# Altium PCB FC_PiHat_REV1.PcbDoc
Units mm, origin at the board's own origin, x right, y up, seen from the top; angles counter-clockwise.
Board outline 65 x 56 mm, 4 copper layers (Top Layer, 5V, GND, Bottom Layer), stack 1.582 mm thick; 52 components, 67 nets, 278 pads, 92 vias.
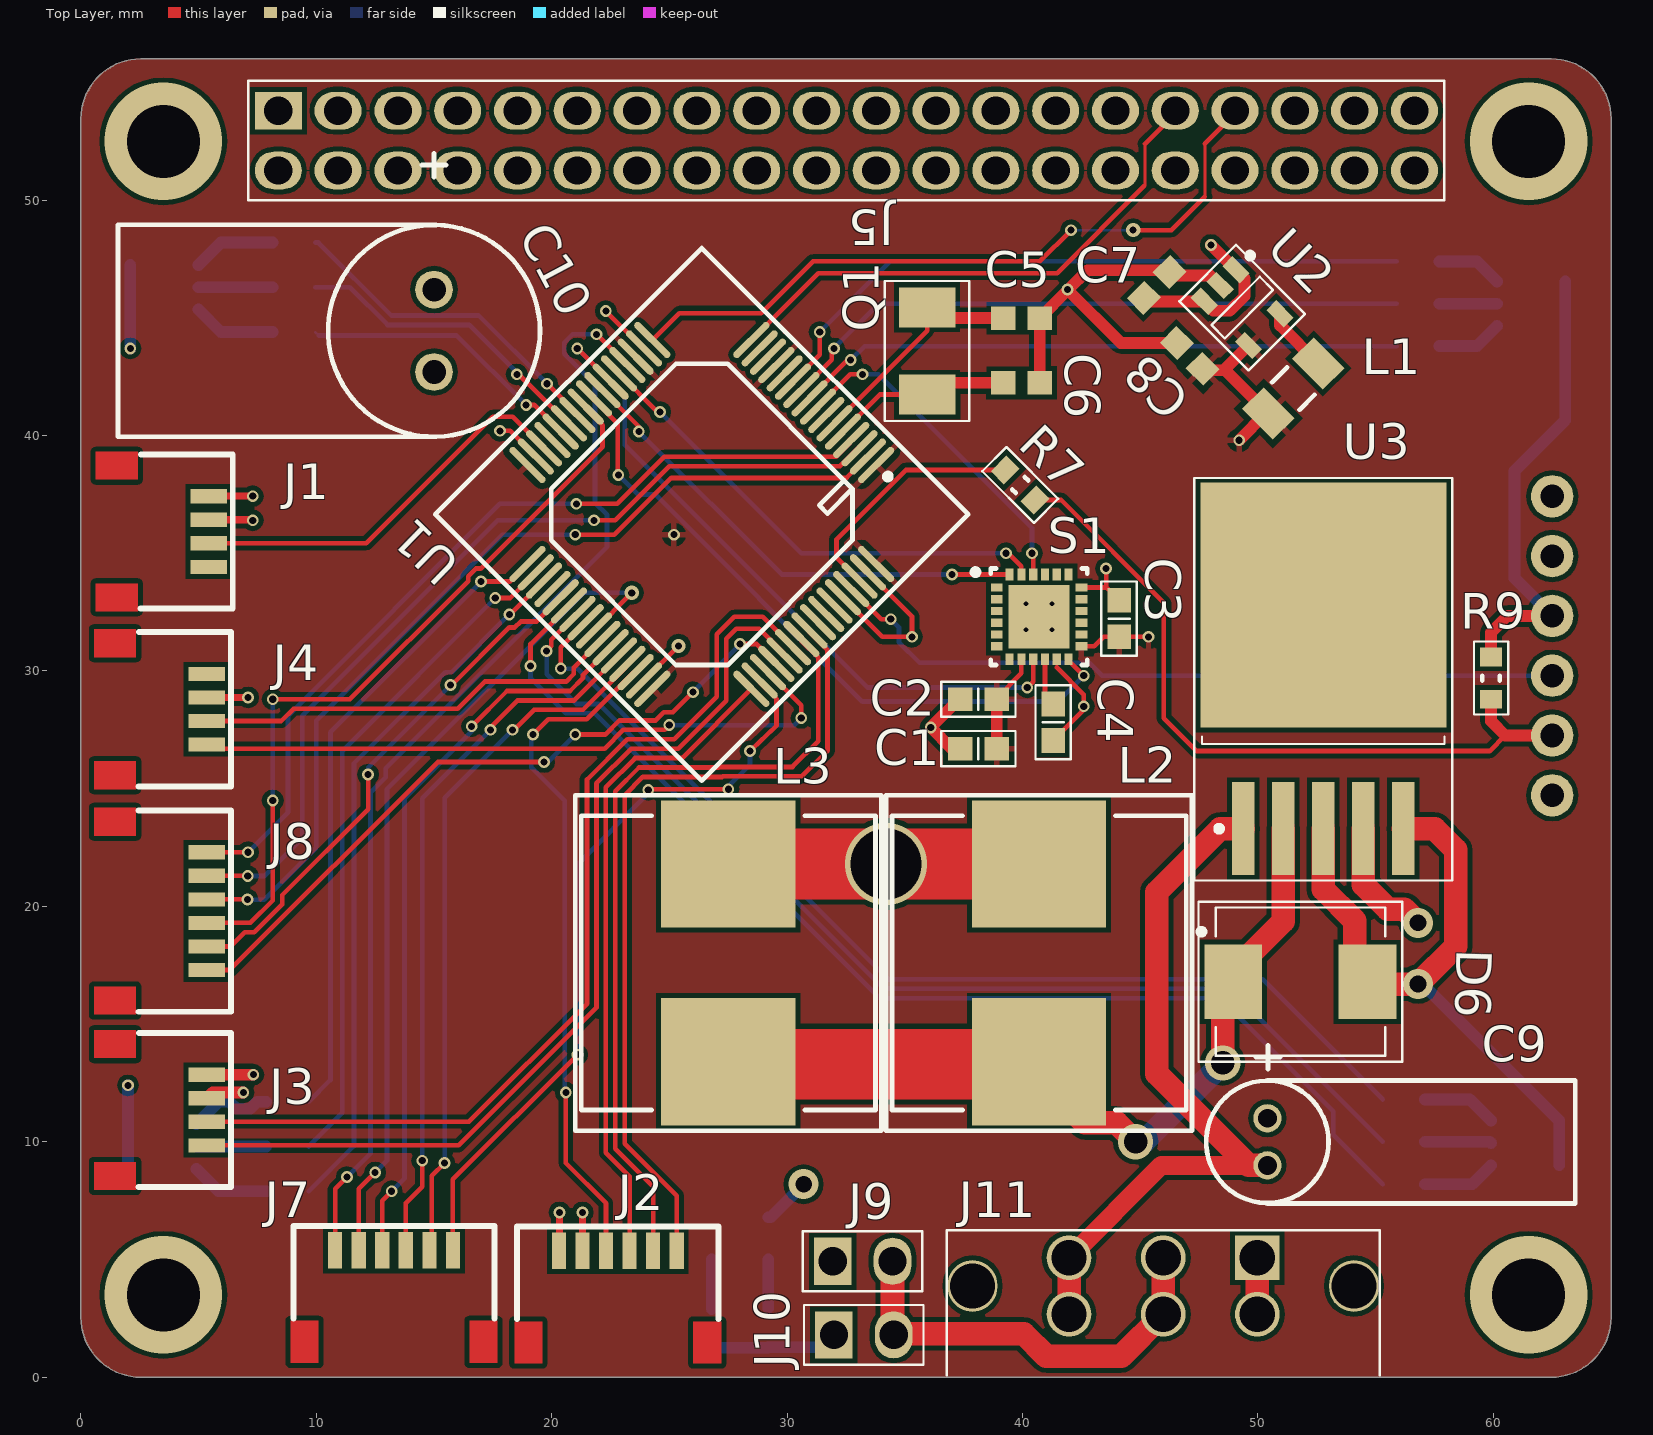
[diagram p0: Top Layer view]
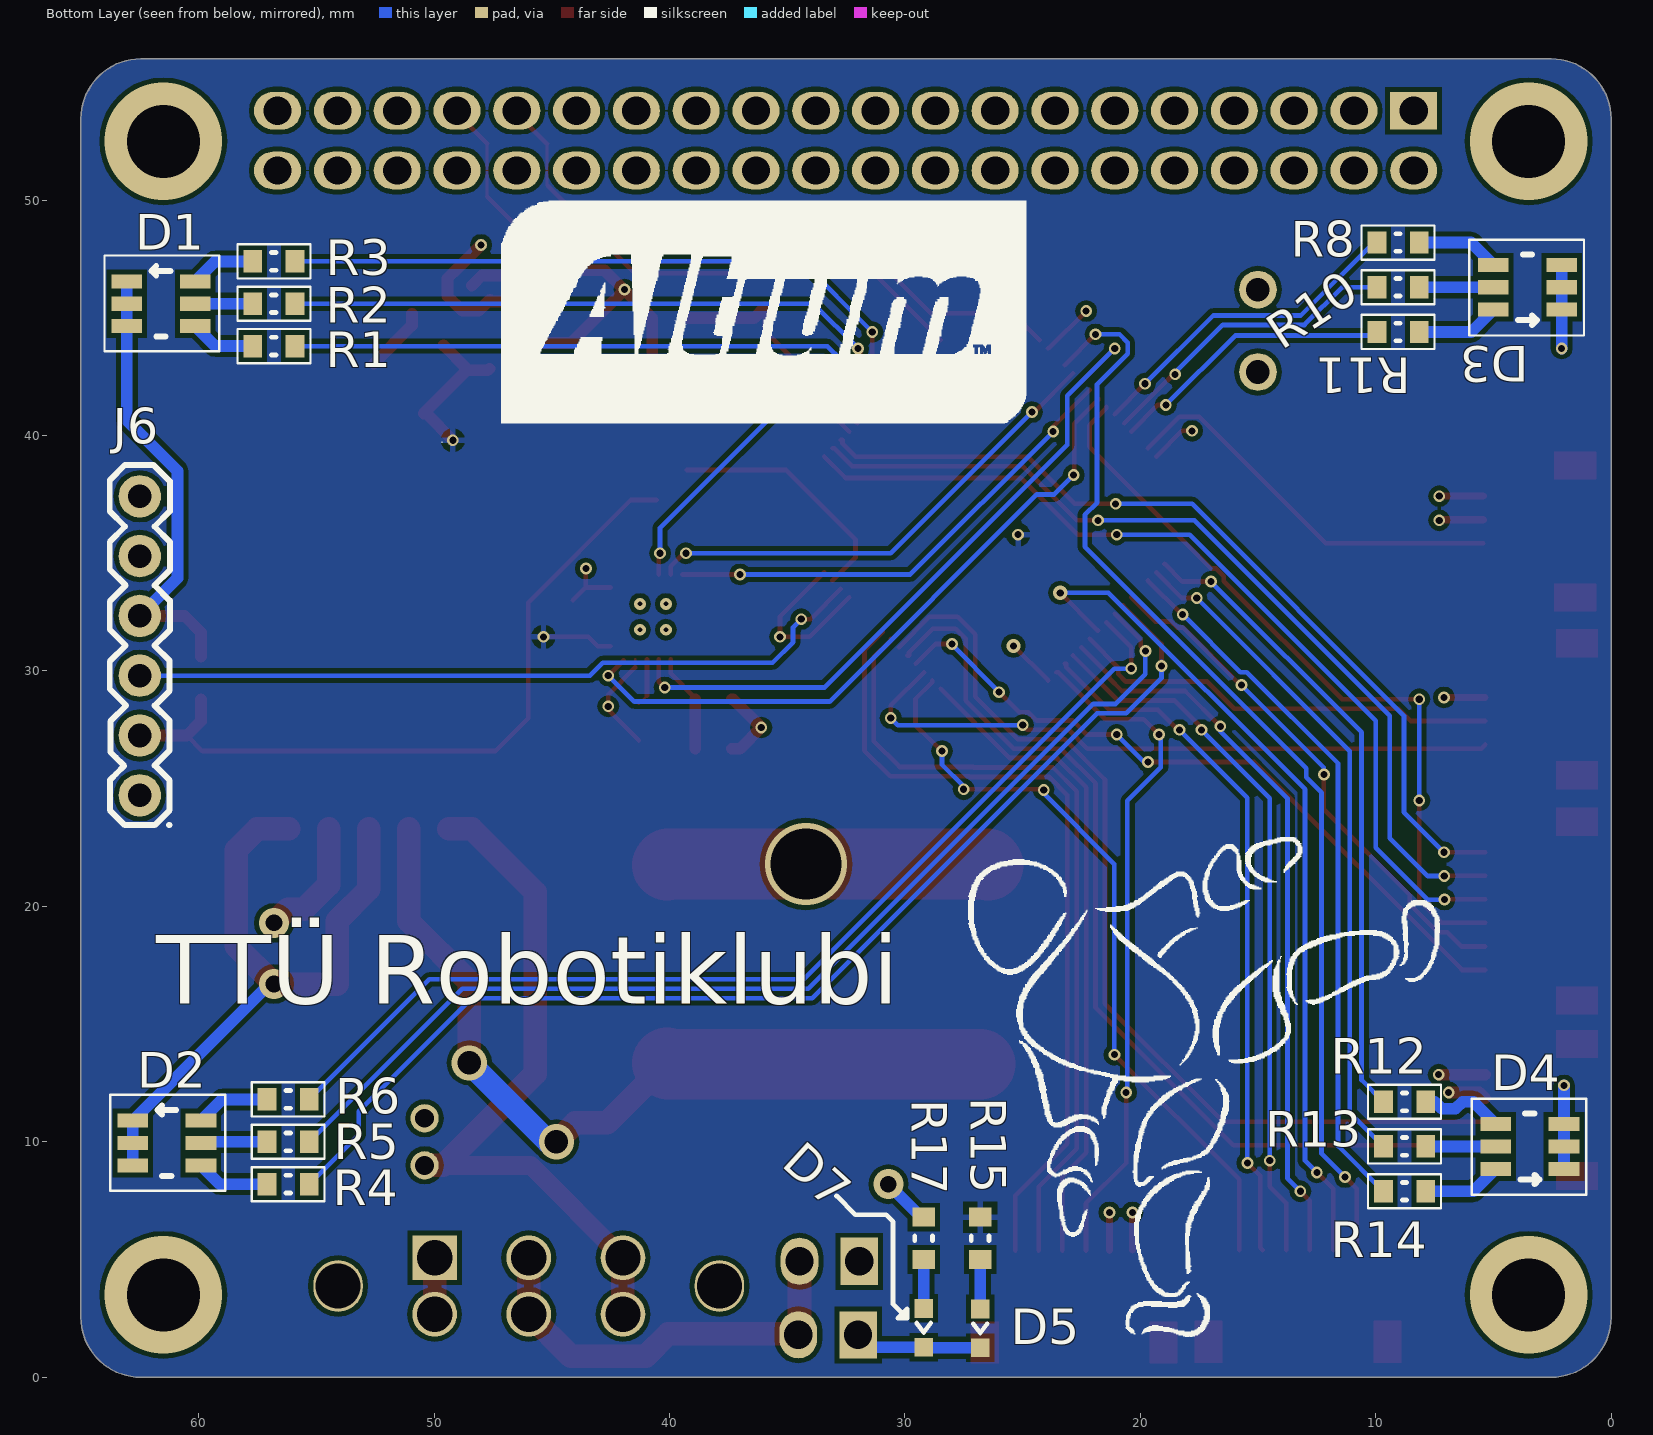
[diagram p1: Bottom Layer view, seen from below]
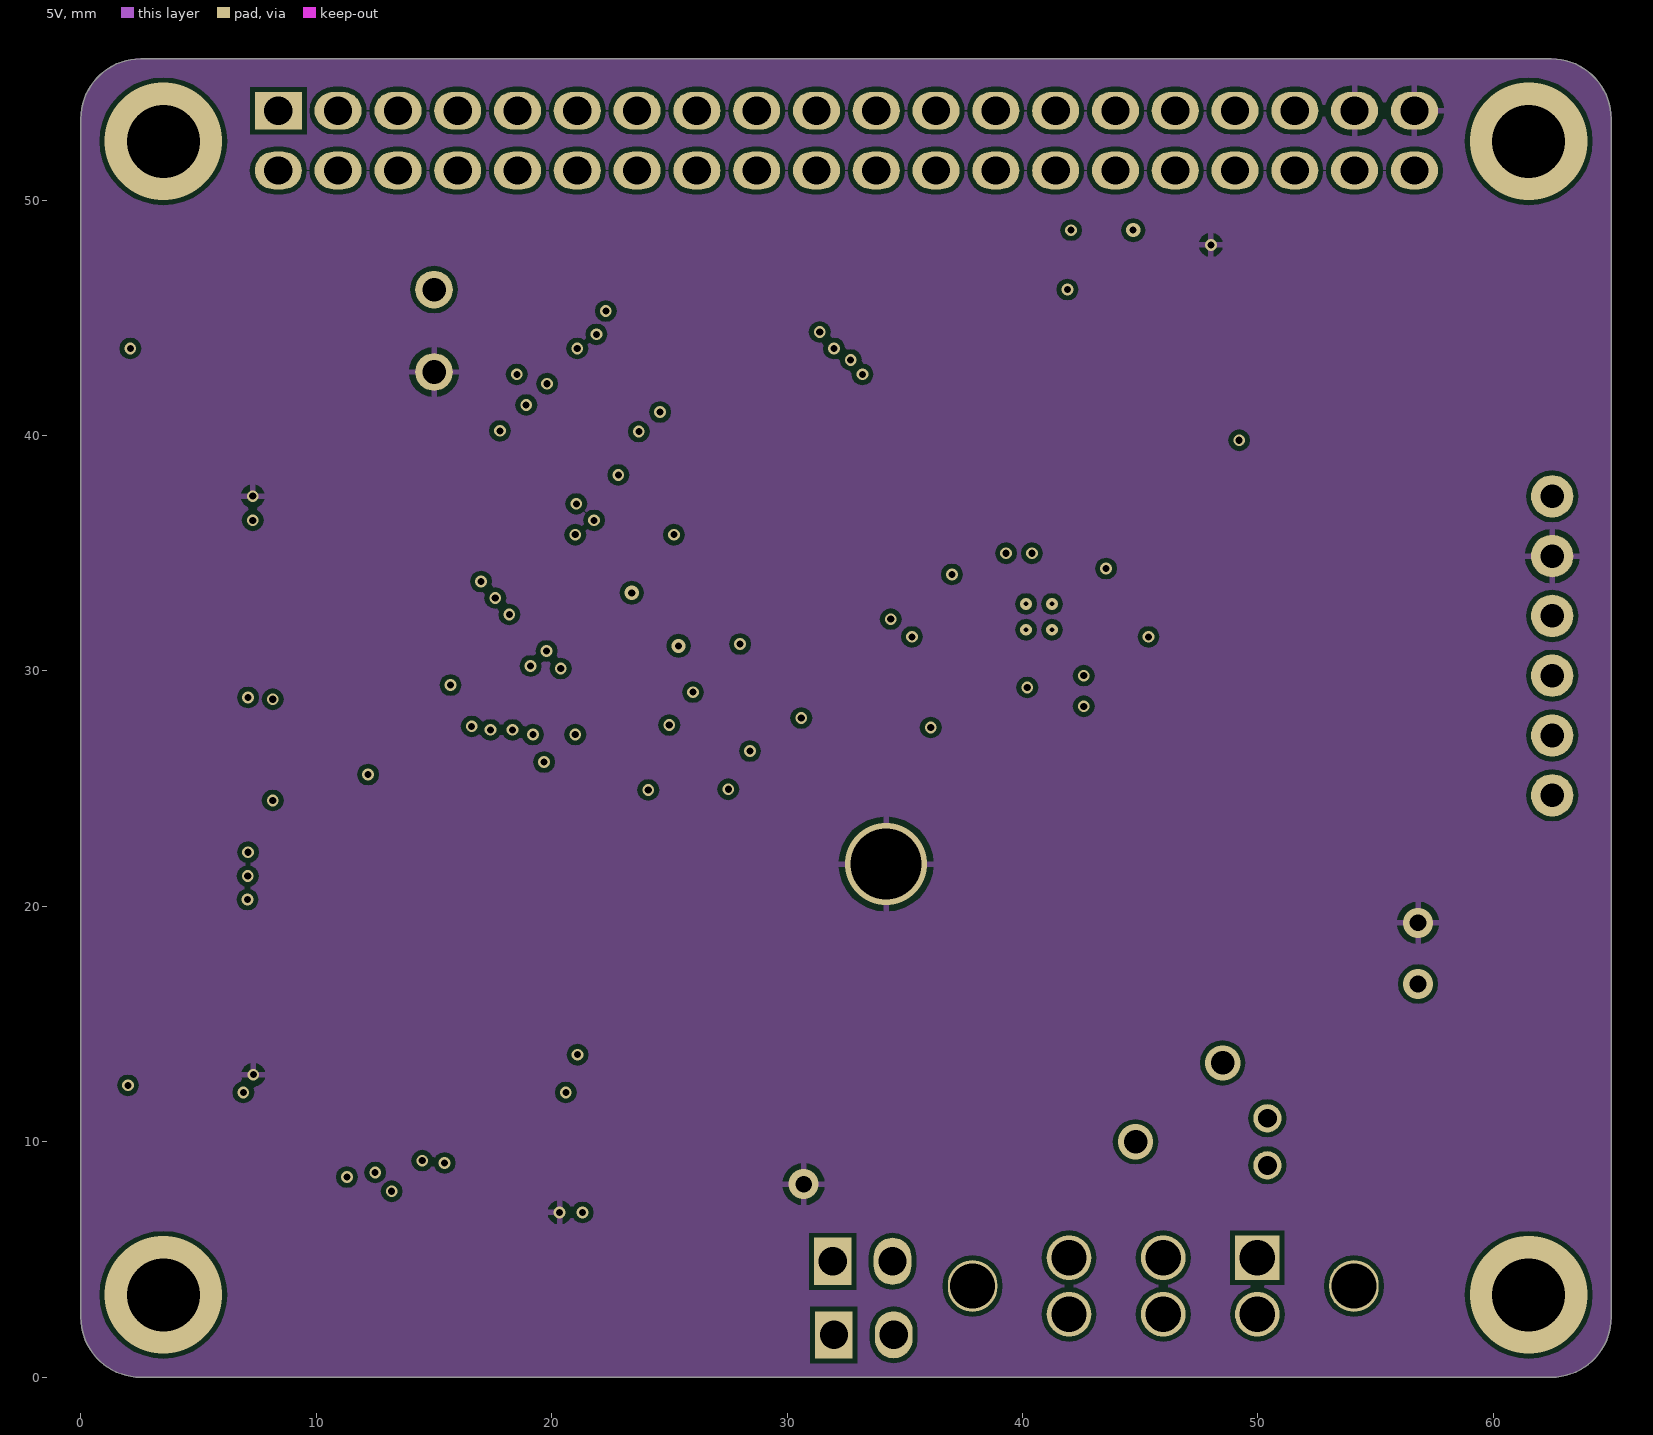
[diagram p2: 5V]
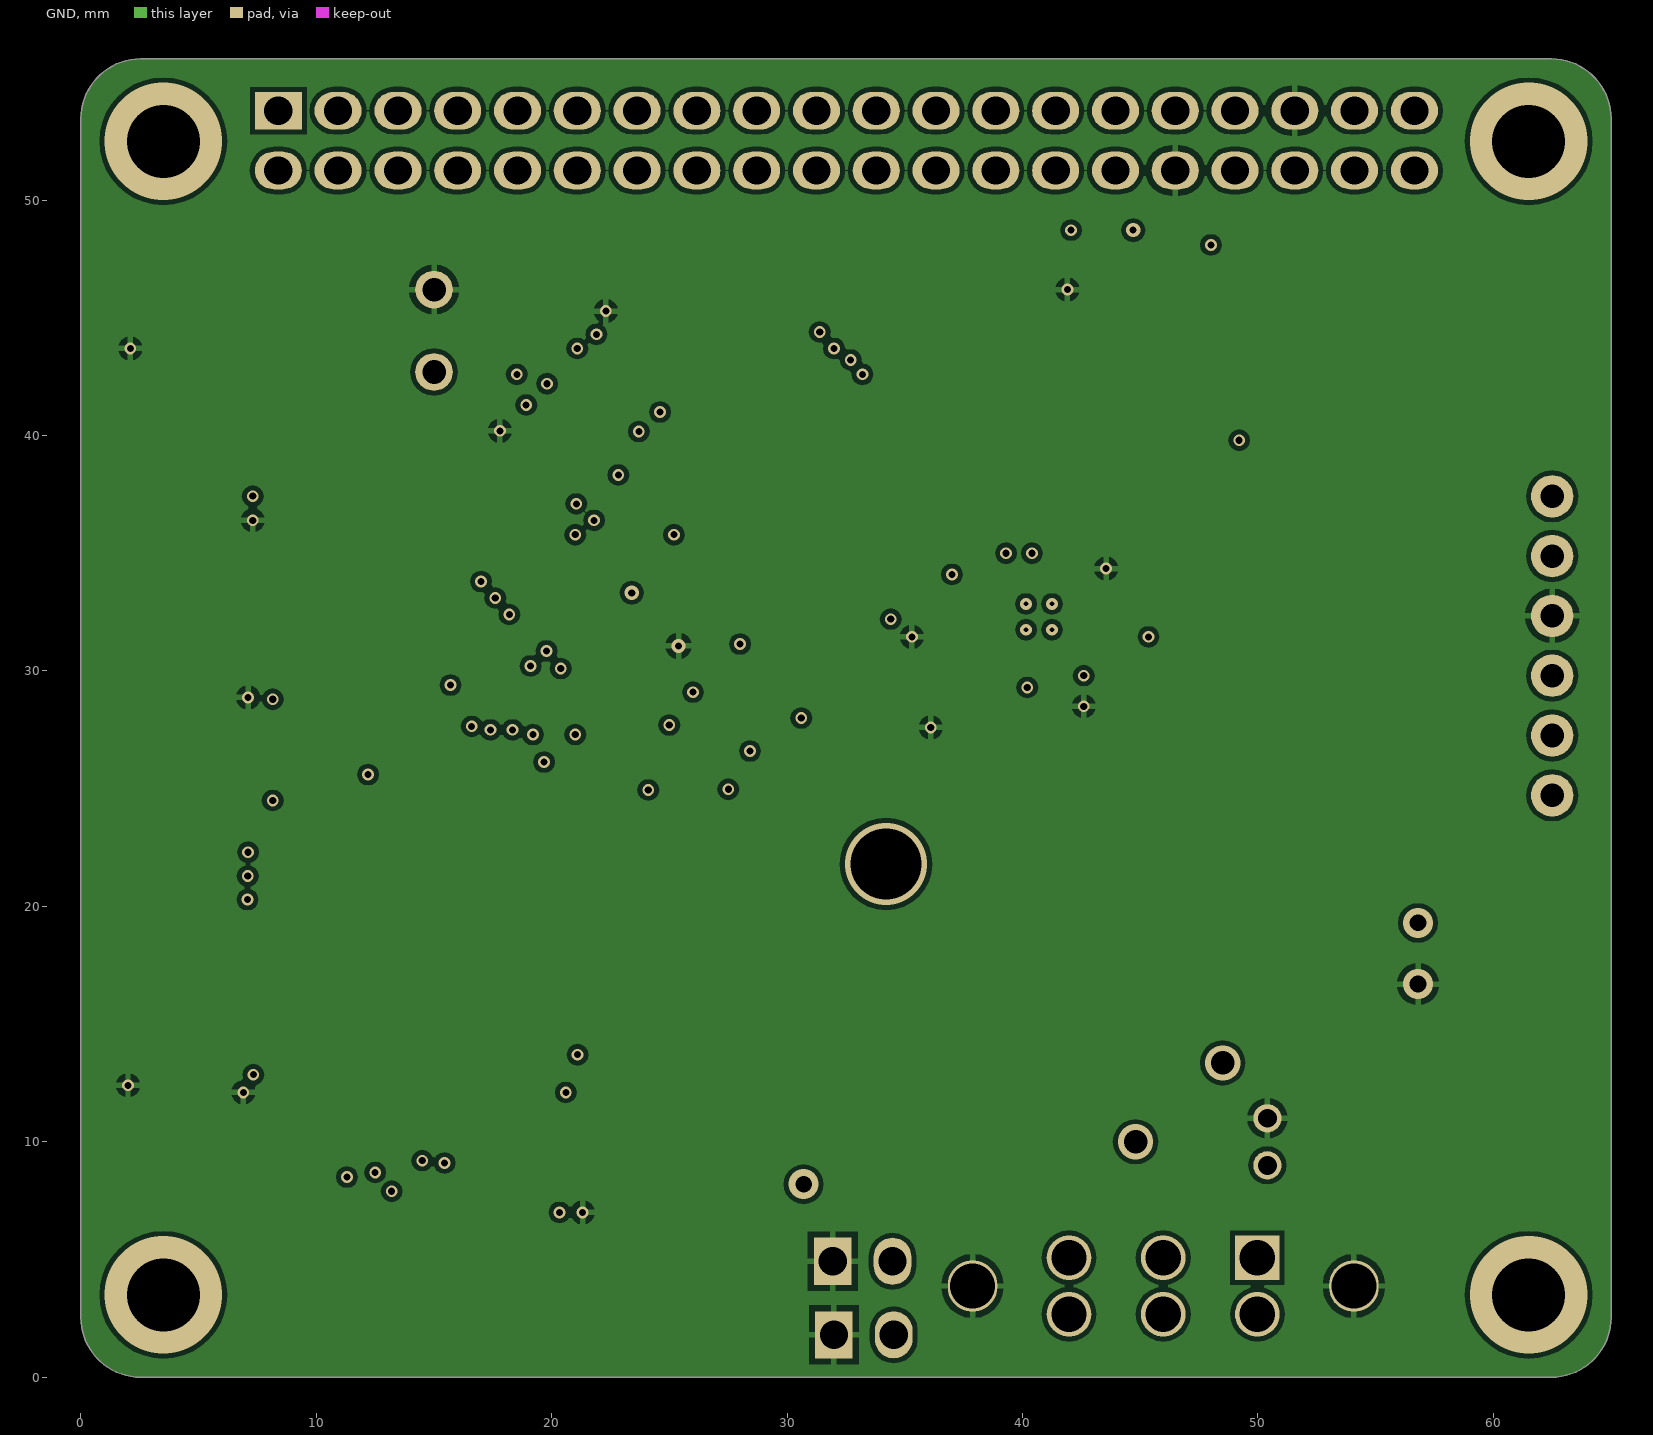
[diagram p3: GND]

## Layer stack, top to bottom
Top Solder: solder mask 0.0102, Solder Resist, Dk 3.5
Top Layer: signal copper 0.205
Dielectric 3: dielectric 0.254, FR-4, Dk 4.8
5V: signal copper 0.205
Dielectric 2: dielectric 0.254, FR-4, Dk 4.8
GND: signal copper 0.205
Dielectric 1: dielectric 0.254, FR-4, Dk 4.8
Bottom Layer: signal copper 0.205
Bottom Solder: solder mask 0.0102, Solder Resist, Dk 3.5

## Board outline
62.46,56 cw(c62.46,53.46) 65,53.46 65,2.54 cw(c62.46,2.54) 62.46,0 2.54,0 cw(c2.54,2.54) 0,2.54 0,53.46 cw(c2.54,53.46) 2.54,56

## Design rules (kind name [scope] priority, off if disabled: settings)
Clearance [All] p1: gap=0.2 ignorepadtopadclearanceinfootprint=TRUE
DiffPairsRouting [All] p1: maxlimit=0.254 minlimit=0.254 mostfreqgap=0.254 substack1={501780D6-565F-4292-AFB8-BEC87CBBFF92} toplayer_{501780d6-565f-4292-afb8-bec87cbbff92}_minwidth=0.381 toplayer_{501780d6-565f-4292-afb8-bec87cbbff92}_maxwidth=0.381 toplayer_{501780d6-565f-4292-afb8-bec87cbbff92}_prefwidth=0.381 midlayer1_{501780d6-565f-4292-afb8-bec87cbbff92}_minwidth=0.381 midlayer1_{501780d6-565f-4292-afb8-bec87cbbff92}_maxwidth=0.381 midlayer1_{501780d6-565f-4292-afb8-bec87cbbff92}_prefwidth=0.381 midlayer2_{501780d6-565f-4292-afb8-bec87cbbff92}_minwidth=0.381 midlayer2_{501780d6-565f-4292-afb8-bec87cbbff92}_maxwidth=0.381 midlayer2_{501780d6-565f-4292-afb8-bec87cbbff92}_prefwidth=0.381 bottomlayer_{501780d6-565f-4292-afb8-bec87cbbff92}_minwidth=0.381 bottomlayer_{501780d6-565f-4292-afb8-bec87cbbff92}_maxwidth=0.381 bottomlayer_{501780d6-565f-4292-afb8-bec87cbbff92}_prefwidth=0.381 toplayer_minwidth=0.381 toplayer_maxwidth=3 toplayer_prefwidth=0.381 midlayer1_minwidth=0.381 midlayer1_maxwidth=3 midlayer1_prefwidth=0.381 midlayer2_minwidth=0.381 midlayer2_maxwidth=3 midlayer2_prefwidth=0.381 bottomlayer_minwidth=0.381 bottomlayer_maxwidth=3 bottomlayer_prefwidth=0.381 maxuncoupledlength=12.7
HoleSize [All] p1: absolutevalues=TRUE maxlimit=3.5 minlimit=0.025 maxpercent=80.000 minpercent=20.000
PolygonConnect [All] p1: connectstyle=Relief reliefconductorwidth=0.254 reliefentries=4 polygonreliefangle="90 Angle" airgapwidth=0.254
RoutingVias [All] p1: holewidth=0.3 width=0.6 viastyle="Through Hole" minholewidth=0.3 minwidth=0.6 maxholewidth=1 maxwidth=3.5
SilkToSolderMaskClearance [IsPad] p1: minsilkscreentomaskgap=0.05 clearancetoexposedcopper=TRUE
SolderMaskExpansion [All] p1: expansion=0.1 istentingtop=FALSE
UnRoutedNet [All] p1: checkbadconnections=TRUE
Width [All] p1: maxlimit=3 minlimit=0.1 preferedwidth=0.5 substack1={501780D6-565F-4292-AFB8-BEC87CBBFF92}
26 further rules are at their usual default settings.

## Classes and differential pairs
component class "Power 5V": C9 C10 D6 D7 J9 J10 J11 L2 L3 R17 U3
component class "Power 3V3": C7 C8 D5 L1 R15 U2
component class Droon_REV3: C1 C2 C3 C4 C5 C6 D1 D2 D3 D4 J1 J2 J3 J4 J5 J6 J7 J8 Q1 R1 R2 R3 R4 R5 R6 R7 R8 R9 R10 R11 R12 R13 R14 S1 U1

## Components (designator, comment, footprint, x,y, rotation, side; value= is the part's Value field where it differs from the comment)
C1 "100nF" C0603 38.125,26.7 r0 top
C2 "100nF" C0603 38.125,28.8 r0 top
C3 "100nF" C0603 44.1,32.225 r270 top
C4 "100nF" C0603 41.3,27.825 r90 top
C5 "100nF" C0603 39.954,44.991 r180 top
C6 "100nF" C0603 39.954,42.242 r180 top
C7 "100nF" C0603 45.7,46.4 r225 top
C8 "100nF" C0603 47.1,43.386 r315 top
C9 "10uF" "Capacitor Through Hole 5x11" 50.4,9 r90 top
C10 "10uF" "Through hole Capacitor 16V 470uF" 15,42.7 r90 top
D1 "OVS-3309" "LED RGB" 61.6,45.6 r270 bottom
D2 "OVS-3309" "LED RGB" 61.35,9.95 r270 bottom
D3 "OVS-3309" "LED RGB" 3.55,46.3 r90 bottom
D4 "OVS-3309" "LED RGB" 3.45,9.8 r90 bottom
D5 "LED Single" "LED 0603" 26.8,2.075 r270 bottom
D6 "*" "Schottky Rectifier diode" 51.8,16.8 r0 top
D7 "LED Single" "LED 0603" 29.2,2.1 r270 bottom
J1 "Receiver" "JST-SH 4pin 1mm pitch" 0.625,39.325 r270 top
J2 "Header 6p" "JST-SH 6pin 1mm pitch" 18.409,0.575 r0 top
J3 "TFMini" "JST-SH 4pin 1mm pitch" 0.55,14.75 r270 top
J4 "FC" "JST-SH 4pin 1mm pitch" 0.55,31.775 r270 top
J5 "RPi_PWR+UART" "Header 2x20 2.54mm" 8.385,51.26 r0 top
J6 "Header 6p" "HEADER 6x1 2.54" 62.5,27.26 r0 bottom
J7 "Header 6p" "JST-SH 6pin 1mm pitch" 8.9,0.6 r0 top
J8 "Header 6p" "JST-SH 6pin 1mm pitch" 0.55,24.2 r270 top
J9 "2x1 Header" "Header 1x2 2.54mm" 31.935,4.925 r90 top
J10 "2x1 Header" "Header 1x2 2.54mm" 31.985,1.8 r90 top
J11 "Power Switch" "POWER SWITCH" 46,3.875 r270 top
L1 "Inductor" C1206 51.5,42 r225 top value=10uH
L2 "Inductor" "Inductor 12.5x12.5x6mm" 40.7,17.6 r90 top value=10uH
L3 "Inductor" "Inductor 12.5x12.5x6mm" 27.5,17.6 r90 top value=10uH
Q1 "16MHz" "Clock 2012\"(5032)" 35.954,45.442 r270 top
R1 "1k" "R 0603" 56.8,43.8 r0 bottom
R2 "1k" "R 0603" 56.8,45.6 r0 bottom
R3 "1k" "R 0603" 56.8,47.4 r0 bottom
R4 "1k" "R 0603" 56.2,8.2 r0 bottom
R5 "1k" "R 0603" 56.2,10 r0 bottom
R6 "1k" "R 0603" 56.2,11.8 r0 bottom
R7 "1k" "R 0603" 39.9,37.9 r315 top
R8 "1k" "R 0603" 9.05,48.2 r180 bottom
R9 "1k" "R 0603" 59.9,29.7 r270 top
R10 "1k" "R 0603" 9.05,46.3 r180 bottom
R11 "1k" "R 0603" 9.05,44.4 r180 bottom
R12 "1k" "R 0603" 8.774,11.7 r180 bottom
R13 "1k" "R 0603" 8.774,9.805 r180 bottom
R14 "1k" "R 0603" 8.774,7.9 r180 bottom
R15 "1k" "R 0603" 26.8,5.9 r90 bottom
R17 "1k" "R 0603" 29.2,5.9 r270 bottom
S1 "S?" IMU-ICM-20689 40.7,32.3 r0 top
U1 "STM32F303RDT6" LQFP64-STM32F303 26.375,36.65 r225 top
U2 "TSOT-5 3V3 REG" "SOT-5 3V3 REG" 49.331,45.4 r315 top
U3 "LM2576-5.0WU" "5V 3A REG" 52.775,29.6 r90 top

## Footprints (in the part's own frame and the unit in brackets; to place one, negate y for a bottom-side part, rotate by r counter-clockwise, add the part's x,y. Pads: shape width x height; smd on the part's side, far side on the other; paste and mask are expansions set on the pad)
"5V 3A REG" [mm]
  rect 3.95x0.95 smd: 1(-6.3,3.4) 2(-6.3,1.7) 3(-6.3,0) 4(-6.3,-1.7) 5(-6.3,-3.4)
  rect 10.4x10.45 smd: 6(3.2,0)
  silkscreen extent -8.5,-5.47 8.6,5.48, body extent -7.21,-5.15 8.03,5.15, height 4.47
C0603 [mm] "0603 capacitor package"
  rect 1.05x1 smd: 1(-0.775,0) 2(0.775,0)
  silkscreen extent -1.58,-0.75 1.58,0.75, body extent -0.9,-0.45 0.9,0.45, height 0.9
C1206 [mm] "1206 capacitor package"
  rect 1.3x1.85 smd: 1(-1.5,0) 2(1.5,0)
  silkscreen extent -0.45,-0.82 0.45,0.82, body extent -1.7,-0.9 1.7,0.9, height 1.5
"Capacitor Through Hole 5x11" [mm] "100uF"
  round 1.2 hole 0.8: 1(0,0) 2(2,0)
  silkscreen extent -1.63,-13.08 5.1,2.6, body extent -1.55,-13.01 3.5,0.31, height 5.03
"Clock 2012\"(5032)" [mm]
  rect 1.7x2.4 smd: 1(0,0) 2(3.7,0)
  silkscreen extent -1.13,-1.8 4.83,1.78, body extent -0.65,-1.63 4.35,1.57, height 1.36
"Header 1x2 2.54mm" [mm]
  rect 2x1.6 hole 1.2: 1(0,0)
  oval 2x1.6 hole 1.2: 2(0,-2.54)
  silkscreen extent -1.27,-3.81 1.27,1.27
"Header 2x20 2.54mm" [mm]
  oval 2x1.6 hole 1.2: 1(45.72,2.54) 1(48.26,2.54) 2(38.1,0) 2(43.18,2.54) 3(40.64,2.54) 4(38.1,2.54) 5(0,0) 5(2.54,0) 5(2.54,2.54) 5(5.08,0) 5(5.08,2.54) 5(7.62,0) 5(7.62,2.54) 5(10.16,0) 5(10.16,2.54) 5(12.7,0) 5(12.7,2.54) 5(15.24,0) 5(15.24,2.54) 5(17.78,0) 5(17.78,2.54) 5(20.32,0) 5(20.32,2.54) 5(22.86,0) 5(22.86,2.54) 5(25.4,0) 5(25.4,2.54) 5(27.94,0) 5(27.94,2.54) 5(30.48,0) 5(30.48,2.54) 5(33.02,0) 5(33.02,2.54) 5(35.56,0) 5(35.56,2.54) 5(40.64,0) 5(43.18,0) 5(45.72,0) 5(48.26,0)
  rect 2x1.6 hole 1.2: 5(0,2.54)
  silkscreen extent -1.27,-1.27 49.52,3.81, body extent -1.4,-1.2 49.7,3.8, height 8.5
"HEADER 6x1 2.54" [mm]
  round 1.8 hole 1: 1(0,2.54) 2(0,0) 3(0,-2.54) 4(0,-5.08) 5(0,-7.62) 6(0,-10.16)
  silkscreen extent -1.28,-11.5 1.28,3.81, body extent -9.8,-11.61 0.26,3.92, height 1.25
IMU-ICM-20689 [mm] "PQFN, 24-Leads, Body 4.00x4.00mm, Pitch 0.50mm, Thermal Pad 2.60x2.70mm, IPC Medium Density"
  rect 0.5x0.35 smd: 1(-1.8,1.25) 2(-1.8,0.75) 3(-1.8,0.25) 4(-1.8,-0.25) 5(-1.8,-0.75) 6(-1.8,-1.25) 13(1.8,-1.25) 14(1.8,-0.75) 15(1.8,-0.25) 16(1.8,0.25) 17(1.8,0.75) 18(1.8,1.25)
  rect 0.35x0.5 smd: 7(-1.25,-1.8) 8(-0.75,-1.8) 9(-0.25,-1.8) 10(0.25,-1.8) 11(0.75,-1.8) 12(1.25,-1.8) 19(1.25,1.8) 20(0.75,1.8) 21(0.25,1.8) 22(-0.25,1.8) 23(-0.75,1.8) 24(-1.25,1.8)
  rect 2.6x2.7 smd: 25(0,0)
  silkscreen extent -2.82,-2.05 2.05,2.05, body extent -2.05,-2.05 2.05,2.05, height 0.9
"Inductor 12.5x12.5x6mm" [mm] "Precision Wire Wound Inductor, 2-Leads, Body 12.50x12.50mm, IPC Medium Density"
  rect 5.4x5.7 smd: 1(-4.2,0) 2(4.2,0)
  silkscreen extent -7.12,-6.5 7.12,6.5, body extent -6.35,-6.25 6.35,6.25, height 6.1
"JST-SH 4pin 1mm pitch" [mm] "Right angle"
  rect 0.6x1.55 smd: 1(1.9,4.8) 2(2.9,4.8) 3(3.9,4.8) 4(4.9,4.8)
  Top Layer region: 5.6,0 6.8,0 6.8,1.8 5.6,1.8
  Top Layer region: 0,0 1.2,0 1.2,1.8 0,1.8
  silkscreen extent 0.13,1.9 6.68,5.82, body extent 0.4,0.11 6.4,5.06, height 2.96
"JST-SH 6pin 1mm pitch" [mm] "Right angle"
  rect 0.6x1.55 smd: 1(1.9,4.8) 2(2.9,4.8) 3(3.9,4.8) 4(4.9,4.8) 5(5.9,4.8) 6(6.9,4.8)
  Top Layer region: 7.6,0 8.8,0 8.8,1.8 7.6,1.8
  Top Layer region: 0,0 1.2,0 1.2,1.8 0,1.8
  silkscreen extent 0.13,1.9 8.67,5.82, body extent 0.4,0.11 8.4,5.06, height 2.96
"LED 0603" [mm]
  rect 0.8x0.8 smd: 1(-0.825,0) 2(0.825,0)
  silkscreen extent -0.2,-0.3 0.2,0.3, body extent -0.8,-0.4 0.8,0.4, height 0.75
"LED RGB" [mm]
  rect 0.6x1.3 smd: BA(-0.95,1.45) BK(-0.95,-1.45) GA(0,1.45) GK(0.95,-1.45) RA(0.95,1.45) RK(0,-1.45)
  silkscreen extent -2.05,-2.4 2.02,2.47, body extent -1.4,-1.7 1.4,1.7, height 1.45
LQFP64-STM32F303 [mm] "CQFP, 64-Leads, Body 14.70x14.70mm, Pitch 0.50mm, IPC Medium Density"
  oval 2.05x0.3 smd: 1(-6.725,3.75) 2(-6.725,3.25) 3(-6.725,2.75) 4(-6.725,2.25) 5(-6.725,1.75) 6(-6.725,1.25) 7(-6.725,0.75) 8(-6.725,0.25) 9(-6.725,-0.25) 10(-6.725,-0.75) 11(-6.725,-1.25) 12(-6.725,-1.75) 13(-6.725,-2.25) 14(-6.725,-2.75) 15(-6.725,-3.25) 16(-6.725,-3.75) 33(6.725,-3.75) 34(6.725,-3.25) 35(6.725,-2.75) 36(6.725,-2.25) 37(6.725,-1.75) 38(6.725,-1.25) 39(6.725,-0.75) 40(6.725,-0.25) 41(6.725,0.25) 42(6.725,0.75) 43(6.725,1.25) 44(6.725,1.75) 45(6.725,2.25) 46(6.725,2.75) 47(6.725,3.25) 48(6.725,3.75)
  oval 0.3x2.05 smd: 17(-3.75,-6.725) 18(-3.25,-6.725) 19(-2.75,-6.725) 20(-2.25,-6.725) 21(-1.75,-6.725) 22(-1.25,-6.725) 23(-0.75,-6.725) 24(-0.25,-6.725) 25(0.25,-6.725) 26(0.75,-6.725) 27(1.25,-6.725) 28(1.75,-6.725) 29(2.25,-6.725) 30(2.75,-6.725) 31(3.25,-6.725) 32(3.75,-6.725) 49(3.75,6.725) 50(3.25,6.725) 51(2.75,6.725) 52(2.25,6.725) 53(1.75,6.725) 54(1.25,6.725) 55(0.75,6.725) 56(0.25,6.725) 57(-0.25,6.725) 58(-0.75,6.725) 59(-1.25,6.725) 60(-1.75,6.725) 61(-2.25,6.725) 62(-2.75,6.725) 63(-3.25,6.725) 64(-3.75,6.725)
  silkscreen extent -8,-8 8,8, body extent -7.35,-7.35 7.35,7.35, height 1.5
"POWER SWITCH" [mm]
  rect 1.9x1.9 hole 1.5: 1(-1.2,3.975)
  round 1.9 hole 1.5: 1(1.2,3.975) 2(-1.2,-0.025) 2(1.2,-0.025) 3(-1.2,-4.025) 3(1.2,-4.025)
  oval 2.2x2.1 hole 1.9: 4(0,8.075) 4(0,-8.125)
  Top Layer lines w1: 1.2,-4.025 -1.2,-4.025 ; 1.2,-0.025 -1.2,-0.025 ; 1.2,3.975 -1.2,3.975
  silkscreen extent -2.37,-9.22 3.8,9.18
"R 0603" [mm] "Chip Resistor, 2-Leads, Body 1,6x0,8mm, IPC Medium Density"
  rect 0.8x0.95 smd: 1(-0.9,0) 2(0.9,0)
  silkscreen extent -1.55,-0.72 1.55,0.72, body extent -0.85,-0.45 0.85,0.45, height 0.55
"Schottky Rectifier diode" [mm] "SS34+ -  Schottky Rectifier, 40 V, 3 A, Single, DO-214AB, 2 Pins, 550 mV"
  rect 2.45x3.15 smd: 1(-2.85,0) 2(2.85,0)
  silkscreen extent -4.32,-3.4 4.33,3.4, body extent -3.77,-3.11 3.78,3.11, height 2.62
"SOT-5 3V3 REG" [mm]
  rect 1.05x0.6 smd: 1(-1.35,0.975) 2(-1.35,0.025) 3(-1.35,-0.925) 4(1.3,-0.925) 5(1.3,0.975)
  silkscreen extent -2.1,-1.68 2.05,1.95, body extent -1.42,-1.43 1.38,1.47, height 1
"Through hole Capacitor 16V 470uF" [mm]
  round 1.6 hole 1: 1(0,0) 2(3.5,0)
  silkscreen extent -2.75,-4.5 9.3,13.43, body extent -2.23,-0.32 5.83,13.5, height 8.03

## Part data
C1 C2 C3 C4 C5 C6 C7 C8: library part Capacitor, "Capacitor Ceramic"
C9 C10: library part "Capacitor Polarized", "Capacitor"
D1 D2 D3 D4: library part "LED Tripple", "LED RGB", FarnellPN=1716792, ManufacturerPN=OVS-3309
D5 D7: "LED"
D6: library part "Diode Schottky", "Diode Schottky"
J1 J3 J4: library part "Header 4p"
J9 J10: library part "2x1 Header (power)"
Q1: library part Crystal, "Quarz crystal"
R1 R2 R3 R4 R5 R6 R7 R8 R9 R10 R11 R12 R13 R14 R15 R17: library part Res, "Resistor"
S1: library part IMU_ICM-20689
U1: library part LQFP64-STM32F303, "ARM Cortex-M4 32-bit MCU, 384 KB Flash, 80 KB Internal RAM, 51 I/Os, 64-Pin LQFP, -40 to 85 degC, Tray"
U2: "ANALOG DEVICES         ADP2108AUJZ-3.3-R7            STEP-DOWN DC/DC CONVERTER, TSOT-5", Case/Package=TSOT, Manufacturer="Analog Devices", Manufacturer Part Number=ADP2108AUJZ-3.3-R7, Max Input Voltage=5.5V, Max Operating Temperature=125°C, Max Output Current=600mA, Min Input Voltage=2.3V, Min Operating Temperature=-40°C, Min Output Voltage=3.3V, Operating Supply Current=30uA, Quiescent Current=18uA, Supplier Part Number 1=2112606, Switching Frequency=3MHz, Accuracy=2%, ComponentLink1Description=http://uk.rs-online.com/webdocs/14ba/0900766b814bac03.pdf?src-supplier=RSComponents, ComponentLink1URL=http://uk.rs-online.com/webdocs/14ba/0900766b814bac03.pdf?src-supplier=RSComponents, ComponentLink2Description=http://www.farnell.com/datasheets/1838518.pdf?src-supplier=Element14, ComponentLink2URL=http://www.farnell.com/datasheets/1838518.pdf?src-supplier=Element14, ComponentLink3Description=http://www.analog.com/static/imported-files/data_sheets/ADP2108.pdf?src-supplier=Avnet, ComponentLink3URL=http://www.analog.com/static/imported-files/data_sheets/ADP2108.pdf?src-supplier=Avnet, ComponentLink4Description=http://www.farnell.com/datasheets/1537430.pdf?src-supplier=Farnell, ComponentLink4URL=http://www.farnell.com/datasheets/1537430.pdf?src-supplier=Farnell, ComponentLink5Description=https://www.analog.com/media/en/technical-documentation/data-sheets/ADP2108.pdf?src-supplier=Digi-Key, ComponentLink5URL=https://www.analog.com/media/en/technical-documentation/data-sheets/ADP2108.pdf?src-supplier=Digi-Key, ComponentLink6Description=http://www.analog.com/media/en/technical-documentation/data-sheets/ADP2108.pdf?src-supplier=Digi-Key, ComponentLink6URL=http://www.analog.com/media/en/technical-documentation/data-sheets/ADP2108.pdf?src-supplier=Digi-Key, Efficiency=95%, Height=0.9mm, Lead Free="Contains Lead", Length=2.9mm, Mount="Surface Mount", Nominal Output Voltage=3.3V, Number of Outputs=1, Number of Pins=5, Output Configuration=Positive, Output Current=600mA, Output Type=Fixed, Output Voltage=3.3V, Packaging="Tape and Reel", Polarity=Positive, Pricing 1="1=1.61, 25=1.25, 50=1.2, 100=1.15, 250=1.03, 500=0.892, 1000=0.845, 2500=0.798 (EUR)", Radiation Hardening=No, REACH SVHC="No SVHC", Stock 1=5315, Supplier 1=Farnell, Synchronous Rectifier=Yes, Width=1.6mm
U3: "IC REG BUCK 5V 3A TO263-5", Case/Package=TO-263, Manufacturer="Microchip Micrel", Max Input Voltage=40V, Max Operating Temperature=85°C, Max Output Current=3A, Min Input Voltage=4V, Min Operating Temperature=-40°C, Min Output Voltage=5V, Package Quantity=50, Supplier Part Number 1=2100269, Switching Frequency=52kHz, ComponentLink1Description=http://components.arrow.com/part/dataview/41722529S2342416N1374?src-supplier=Arrow, ComponentLink1URL=http://components.arrow.com/part/dataview/41722529S2342416N1374?src-supplier=Arrow, ComponentLink2Description=http://www.micrel.com/_PDF/lm2576.pdf?src-supplier=Future+Electronics, ComponentLink2URL=http://www.micrel.com/_PDF/lm2576.pdf?src-supplier=Future+Electronics, ComponentLink3Description=http://www.microchip.com/mymicrochip/filehandler.aspx?ddocname=en579007&src-supplier=Digi-Key, ComponentLink3URL=http://www.microchip.com/mymicrochip/filehandler.aspx?ddocname=en579007&src-supplier=Digi-Key, ComponentLink4Description=https://www.verical.com/server-webapp/html/getDatasheet?partID=716600&src-supplier=Verical, ComponentLink4URL=https://www.verical.com/server-webapp/html/getDatasheet?partID=716600&src-supplier=Verical, Efficiency=82%, Height=4.59mm, Lead Free="Lead Free", Length=10.67mm, Manufacturer Part Number=LM2576-5.0WU, Mount="Surface Mount", Nominal Output Voltage=5V, Number of Outputs=1, Number of Pins=5, Output Configuration=Positive, Output Current=3A, Output Type=Fixed, Output Voltage=5V, Packaging=Bulk, Radiation Hardening=No, REACH SVHC="No SVHC", Stock 1=0, Supplier 1=Farnell, Synchronous Rectifier=No, Width=9.17mm
J11: Supplier 1=Farnell

## Via types
v1: diameter 0.5, hole 0.3, Top Layer to Bottom Layer, 75 vias
v2: diameter 0.5, hole 0.2, Top Layer to Bottom Layer, 4 vias
v3: diameter 5, hole 3.1, Top Layer to Bottom Layer, 4 vias
v4: diameter 0.6, hole 0.3, Top Layer to Bottom Layer, 3 vias
v5: diameter 1.27, hole 0.711, Top Layer to Bottom Layer, 3 vias
v6: diameter 1.5, hole 1, Top Layer to Bottom Layer, 2 vias
v7: diameter 3.5, hole 3, Top Layer to Bottom Layer, 1 vias

## Nets (pads, with @x,y where several pads share a name; then routed paths per layer and width w, separated by ;. In a path a pad name is that pad's centre, name@x,y a point inside that pad or via, vN(x,y) a via of type N, cw(c..) or ccw(c..) an arc to the next point about the centre after c; other vN are vias at no path point)
+5: C7.2 C10.1 J1.1 J2.1 J3.1 J5.1 J6.5 L2.2 L3.2 R17.1 U2.1 U2.3 U3.4 | length 34.4
  Top Layer w0.1: J2.1 J2.1@20.334,5.4 ; L3.2@26.4,21.7 L3.2@26.45,21.75
  Top Layer w0.3: J1.1 v1(7.3,37.425) ; J2.1@20.334,5.4 v1(20.334,7)
  Top Layer w0.5: J3.1 v1(7.325,12.85) ; C7.2 45.303,45.701 U2.3@47.699,45.701 ; U2.3@47.626,45.774 U2.3@47.699,45.701 ; U2.3 U2.3@47.699,45.701 ; v1(48,48.1) 48.97,47.13 48.97,47.117 48.985,47.117 49.428,46.675 49.428,45.928 48.8,45.3 48.1,45.3 U2.3@47.699,45.701
  Top Layer w1: U3.4 54.475,20.925 55.519,19.881 56.219,19.881 v5(56.8,19.3)
  Top Layer w3: L3.2@26.45,21.75 26.5,21.8 v7(34.2,21.8) 40.05,21.8 L2.2@40.1,21.75
  Bottom Layer w0.5: R17.1 29.3,6.8 v5(30.7,8.2)
BLUE_1: R3.1 U1.11 | length 28.3
  Top Layer w0.2: U1.11 31.385,43.428 v1(31.385,44.4)
  Bottom Layer w0.2: v1(31.385,44.4) 34.385,47.4 R3.1
BLUE_2: R6.1 U1.40 | length 44.9
  Top Layer w0.2: v1(20.382,30.1) 20.382,31.011 U1.40
  Bottom Layer w0.2: v1(20.382,30.1) 21.1,30.1 34.3,16.9 50.2,16.9 R6.1
BLUE_3: R11.1 U1.28 | length 12.2
  Top Layer w0.2: v1(18.916,41.3) 19.25,41.3 U1.28
  Bottom Layer w0.1: R11.1 R11.1@10.1,44.25
  Bottom Layer w0.2: R11.1@10.1,44.25 15.966,44.25 v1(18.916,41.3)
BLUE_4: R14.1 U1.35 | length 30.3
  Top Layer w0.1: v1(18.2,32.4) v1@18.236,32.4
  Top Layer w0.2: v1@18.236,32.4 U1.35
  Bottom Layer w0.2: R14.1 11.6,9.826 11.6,26.078 15.472,29.95 15.75,29.95 v1(18.2,32.4)
GND: C1.1 C2.1 C3.1 C4.1 C5.1 C6.1 C7.1 C8.1 C9.2 C10.2 D1.BK D1.GK D1.RK D2.BK D2.GK D2.RK D3.BK D3.GK D3.RK D4.BK D4.GK D4.RK D5.2 D6.2 D7.2 J1.2 J2.2 J3.2 J4.2 J5.2 J6.4 J9.1 J10.1 J11.4 R9.1 S1.11 S1.18 U1.18 U1.31 U1.47 U1.60 U1.63 U2.2 U3.3 U3.5 | length 109.3
  Top Layer w0.1: v1@7.275,36.425 v1(7.3,36.4) ; 41.45,30.15 S1.11 ; v1@42.6,28.35 v1(42.6,28.5)
  Top Layer w0.2: v1(17.8,40.2) 18.229,40.2 U1.31 ; v1(22.298,45.288) 23.883,43.703 U1.18 ; U1.47 v4(25.388,31.067) ; U1.60 34.05,31.45 v1(35.3,31.45) 35.3,32.321 U1.63 ; C4.1 v1@42.6,28.35 ; 41.45,30.15 42.6,29 v1(42.6,28.5) ; S1.18 43.55,33.55 ; v1(43.55,34.35) 43.55,33.55 ; C3.1 43.55,33.55
  Top Layer w0.3: J4.2 v1(7.1,28.875) ; J1.2 v1@7.275,36.425 ; J2.2 v1(21.309,7)
  Top Layer w0.5: J3.2 5.6,12.1 v1(6.9,12.1) ; C1.1 37,26.7 v1(36.1,27.6) 37.3,28.8 C2.1 ; C6.1 C5.1 v1@41.92,46.183 ; C8.1 44.17,43.934 v1@41.92,46.183 ; U2.2 47.967,46.8 46.396,46.8 C7.1 46.248,47.027 42.764,47.027 v1@41.92,46.183 ; R9.1 59.9,31.64 60.6,32.34 J6.4
  Top Layer w1: U3.3 52.775,20.725 54.105,19.395 54.105,16.7 v5(56.8,16.7) 58.4,18.3 58.4,22.4 57.5,23.3 U3.5
  Bottom Layer w0.5: D4.BK D4.RK D4.GK v1(2,12.4) ; v1(2.1,43.7) D3.BK D3.RK D3.GK ; D5.2 29.175,1.25 D7.2 31.46,1.275 J10.1 ; v5(56.8,16.7) 57,16.7 D2.BK D2.RK D2.GK ; J6.4 60.9,33.94 60.9,38.5 63.05,40.65 D1.GK D1.RK D1.BK
  other v1: 41.904,46.2
GREEN_1: R2.1 U1.10 | length 27
  Top Layer w0.2: U1.10 31.893,43.229 31.893,43.608 v1(31.985,43.7)
  Bottom Layer w0.2: v1(31.985,43.7) 33.885,45.6 R2.1
GREEN_2: R5.1 U1.39 | length 46.9
  Top Layer w0.2: v1(19.782,30.85) 19.982,31.05 19.982,31.318 U1.39
  Bottom Layer w0.2: v1(19.782,30.85) 19.782,29.861 21.043,28.6 22,28.6 34.1,16.5 48.8,16.5 R5.1
GREEN_3: R10.1 U1.27 | length 13.7
  Top Layer w0.1: v1(18.516,42.6) 18.816,42.3 ; U1.27@20.679,40.521 U1.27
  Top Layer w0.2: v1(18.516,42.6) 18.6,42.6 U1.27@20.679,40.521
  Bottom Layer w0.2: R10.1 11.426,46.3 13.026,44.7 15.94,44.7 16.5,44.7 18.516,42.684 v1(18.516,42.6)
GREEN_4: R13.1 U1.34 | length 28.8
  Top Layer w0.2: v1(17.6,33.1) 18.229,33.1 U1.34
  Bottom Layer w0.2: R13.1 11.1,11.231 11.1,26.6 v1(17.6,33.1)
IBUS: J1.3 U1.30 | length 17
  Top Layer w0.2: J1.3 12.125,35.425 17.5,40.8 18.336,40.8 U1.30
NetC4_2: C4.2 S1.10 | length 2
  Top Layer w0.1: C4.2@40.95,28.95 C4.2
  Top Layer w0.2: C4.2@40.95,28.95 S1.10
NetC5_2: C5.2 Q1.1 U1.6 | length 10
  Top Layer w0.2: U1.6 35.954,44.461 Q1.1
  Top Layer w0.5: Q1.1 36.404,44.991 C5.2
NetC6_2: C6.2 Q1.2 U1.5 | length 7.7
  Top Layer w0.2: U1.5 33.942,41.742 Q1.2
  Top Layer w0.5: Q1.2 36.454,42.242 C6.2
NetC9_1: C9.1 J11.3 U3.1 | length 28.9
  Top Layer w0.8: J11.3@41.975,5.075 45.9,9 C9.1
  Top Layer w1: U3.1 48.4,23.3 45.7,20.6 45.7,12.9 49.6,9 C9.1
NetD1_BA: D1.BA R3.2 | length 2.8
  Bottom Layer w0.5: R3.2 59.3,47.4 D1.BA
NetD1_GA: D1.GA R2.2 | length 2.5
  Bottom Layer w0.5: R2.2 D1.GA
NetD1_RA: D1.RA R1.2 | length 2.8
  Bottom Layer w0.5: R1.2 59.3,43.8 D1.RA
NetD2_BA: D2.BA R6.2 | length 3.2
  Bottom Layer w0.5: R6.2 59,11.8 D2.BA
NetD2_GA: D2.GA R5.2 | length 2.8
  Bottom Layer w0.5: R5.2 59.85,10 D2.GA
NetD2_RA: D2.RA R4.2 | length 3.1
  Bottom Layer w0.5: R4.2 59.1,8.2 D2.RA
NetD3_BA: D3.BA R11.2 | length 3.5
  Bottom Layer w0.5: D3.BA 5.95,44.4 R11.2
NetD3_GA: D3.GA R10.2 | length 3.2
  Bottom Layer w0.5: D3.GA R10.2
NetD3_RA: D3.RA R8.2 | length 3.5
  Bottom Layer w0.5: D3.RA 5.95,48.2 R8.2
NetD4_BA: D4.BA R14.2 | length 3.4
  Bottom Layer w0.5: D4.BA 5.85,7.9 R14.2
NetD4_GA: D4.GA R13.2 | length 3
  Bottom Layer w0.5: D4.GA 4.905,9.805 R13.2
NetD4_RA: D4.RA R12.2 | length 3.6
  Bottom Layer w0.5: D4.RA 5.85,11.7 6.31,11.7 6.61,11.4 7.19,11.4 7.49,11.7 R12.2
NetD5_1: D5.1 R15.1 | length 2.1
  Bottom Layer w0.5: D5.1 R15.1
NetD6_1: D6.1 L2.1 L3.1 U3.2 | length 36
  Top Layer w0.1: L3.1@26.4,13.3 L3.1@26.8,13.3
  Top Layer w1: L2.1@40.1,13.35 42.65,10.8 44,10.8 v6(44.8,10) ; v6(48.5,13.35) 48.5,16.605 48.405,16.7 51.075,19.37 U3.2
  Top Layer w3: L3.1@26.8,13.3 40.05,13.3 L2.1@40.1,13.35
  Bottom Layer w1: v6(44.8,10) 45.15,10 v6(48.5,13.35)
NetD7_1: D7.1 R17.2 | length 2.1
  Bottom Layer w0.5: D7.1 R17.2
NetJ5_3: J5.3 U1.17 | length 30.7
  Top Layer w0.12: 47.744,50.144 47.744,50.313 ; 47.745,52.395 47.745,50.314 ; 47.744,50.313 47.745,50.314
  Top Layer w0.2: U1.17 25.414,45.2 28.9,45.2 31.1,47.4 40.735,47.4 v1(42.06,48.725) ; v4(44.7,48.725) 46.325,48.725 47.744,50.144 ; 47.745,52.395 J5.3@49.515,54.165
  Bottom Layer w0.1: v1(42.06,48.725) v4(44.7,48.725)
NetJ5_4: J5.4 U1.16 | length 23.7
  Top Layer w0.12: 45.175,50.609 45.205,50.639 45.205,52.395
  Top Layer w0.2: U1.16 31.322,46.9 41.466,46.9 45.175,50.609 ; 45.205,52.395 J5.4@46.975,54.165
NetJ6_2: J6.2 R7.2 R9.2 | length 31.3
  Top Layer w0.2: R7.2 41.636,37.264 46,32.9 46,28 47.4,26.6 59.84,26.6 60.5,27.26
  Top Layer w0.5: R9.2 59.9,27.86 60.5,27.26 J6.2
NetJ6_3: J6.3 U1.61 | length 31.7
  Top Layer w0.2: U1.61 34.007,32.2 v1(34.4,32.2)
  Bottom Layer w0.2: v1(34.4,32.2) 34.75,31.85 34.75,31.222 35.622,30.35 42.828,30.35 43.378,29.8 J6.3
NetJ7_1: J7.1 U1.20 | length 47.4
  Top Layer w0.2: J7.1 10.8,8 v1(11.3,8.5) ; v1(21.9,44.3) 21.907,44.3 U1.20
  Bottom Layer w0.2: v1(11.3,8.5) 12.3,9.5 12.3,24.833 12.95,25.483 12.95,25.872 22.35,35.272 22.35,36.628 21.834,37.143 21.834,42.173 20.535,43.472 20.535,43.953 20.882,44.3 v1(21.9,44.3)
NetJ7_2: J7.2 U1.41 | length 36.2
  Top Layer w0.2: J7.2 11.8,8 v1(12.5,8.7) ; U1.41 v4(23.4,33.321)
  Bottom Layer w0.2: v1(12.5,8.7) 13,9.2 13,24.968 21.354,33.321 v4(23.4,33.321)
NetJ7_3: J7.3 U1.43 | length 31.3
  Top Layer w0.2: J7.3 12.8,7.5 v1(13.2,7.9) ; v1(16.6,27.65) 18.1,29.15 20.776,29.15 21.332,29.707 21.332,29.84 U1.43
  Bottom Layer w0.2: v1(13.2,7.9) 13.75,8.45 13.75,24.6 16.6,27.45 16.5,27.55 v1(16.6,27.65)
NetJ7_4: J7.4 U1.44 | length 30.4
  Top Layer w0.2: J7.4 13.8,7.4 14.5,8.1 v1(14.5,9.2) ; v1(17.4,27.5) 17.4,27.6 18.55,28.75 20.95,28.75 U1.44
  Bottom Layer w0.2: v1(14.5,9.2) 14.5,24.6 v1(17.4,27.5)
NetJ7_5: J7.5 U1.45 | length 29.7
  Top Layer w0.2: J7.5 14.9,5.5 14.9,8.55 v1(15.45,9.1) ; v1(18.336,27.5) 18.4,27.5 19.25,28.35 21.328,28.35 23.14,30.162 23.14,30.304 U1.45
  Bottom Layer w0.2: v1(15.45,9.1) 15.45,24.614 v1(18.336,27.5)
NetJ7_6: J7.6 U1.50 | length 32.2
  Top Layer w0.2: J7.6 15.8,8.4 v1(21.1,13.7) ; v1(24.1,24.95) 24.125,24.975 v1(27.5,24.975) ; v1(28.422,26.6) 29.547,27.669 29.547,28.811 28.832,29.526 U1.50
  Bottom Layer w0.2: v1(21.1,13.7) 21.1,21.8 24.1,24.8 v1(24.1,24.95) ; v1(27.5,24.975) 27.5,25.1 28.422,26.022 v1(28.422,26.6)
NetJ8_1: J8.1 U1.4 | length 37.1
  Top Layer w0.2: J8.1 v1(7.1,22.3) ; v1(21.043,37.1) 22.775,37.1 24.774,39.099 32.077,39.099 32.651,39.673 32.651,39.814 U1.4
  Bottom Layer w0.2: v1(7.1,22.3) 8.8,24 8.8,28.1 17.8,37.1 v1(21.043,37.1)
NetJ8_2: J8.2 U1.3 | length 38.3
  Top Layer w0.2: J8.2 7.077,21.3 v1(7.088,21.288) ; v1(21.8,36.4) 22.7,36.4 24.999,38.699 32.243,38.699 33.004,39.461 U1.3
  Bottom Layer w0.2: v1(7.088,21.288) 7.788,21.288 9.4,22.9 9.4,28.1 17.7,36.4 v1(21.8,36.4)
NetJ8_3: J8.3 U1.2 | length 39
  Top Layer w0.2: J8.3 7.065,20.3 v1(7.077,20.288) ; v1(21,35.788) 22.654,35.788 24.991,38.125 24.999,38.125 25.074,38.2 32.521,38.2 U1.2
  Bottom Layer w0.2: v1(7.077,20.288) 7.788,20.288 10,22.5 10,27.888 17.9,35.788 v1(21,35.788)
NetJ8_4: J8.4 U1.25 | length 32.3
  Top Layer w0.2: J8.4 7.2,19.3 8.15,20.25 v1(8.15,24.5) ; v1(8.15,28.8) 11.429,28.8 16.45,33.821 16.45,34.028 16.772,34.35 16.979,34.35 22.158,39.529 22.158,40.443 21.443,41.158 U1.25
  Bottom Layer w0.2: v1(8.15,24.5) v1(8.15,28.8)
NetJ8_5: J8.5 U1.37 | length 22.6
  Top Layer w0.2: J8.5 6.366,18.3 6.966,18.9 7.366,18.9 8.55,20.084 8.55,20.484 12.2,24.134 v1(12.2,25.6) ; v1@15.7,29.3 v1@15.7,29.354 ; v1(15.7,29.4) v1@15.7,29.354 ; U1.37 19.35,32.1 18.678,32.1 18.428,31.85 18.196,31.85 v1@15.7,29.354
  Bottom Layer w0.2: v1(12.2,25.6) 12.2,25.9 v1(15.7,29.4)
NetJ8_6: J8.6 U1.52 | length 30.3
  Top Layer w0.2: J8.6 6.331,17.3 15.163,26.132 v1(19.675,26.132) ; v1(21,27.3) 22.278,27.3 22.878,27.9 24.413,27.9 24.763,28.25 25.15,28.25 v1(26,29.1) ; v1(28,31.143) 28.7,31.143 U1.52
  Bottom Layer w0.2: v1(19.675,26.132) 19.832,26.132 v1(21,27.3) ; v1(26,29.1) v1(28,31.143)
NetJ9_2: J9.2 J10.2 J11.2 | length 15.7
  Top Layer w1: J9.2 34.475,1.85 40.05,1.85 41,0.9 44.2,0.9 J11.2@45.975,2.675
NetL1_1: L1.1 U2.5 | length 2.8
  Top Layer w0.5: U2.5 50.94,44.681 L1.1
NetR7_1: R7.1 U1.62 | length 10.5
  Top Layer w0.2: U1.62 32.1,34.814 32.1,35.6 35.036,38.536 R7.1
NetS1_12: S1.12 U1.24 | length 28.9
  Top Layer w0.1: S1.12@41.95,30.45 S1.12
  Top Layer w0.2: U1.24 21.796,41.511 22.8,40.508 22.8,38.357 v1(22.829,38.329) ; S1.12@41.95,30.45 v1(42.6,29.8)
  Bottom Layer w0.2: v1(22.829,38.329) 23.657,37.5 24.4,37.5 33.2,28.7 41.5,28.7 v1(42.6,29.8)
NetS1_22: S1.22 U1.8 | length 14.4
  Top Layer w0.2: U1.8 32.679,42.6 v1(33.2,42.6) ; v1(40.4,35) 40.45,34.95 S1.22
  Bottom Layer w0.2: v1(33.2,42.6) 33.879,42.6 40.4,36.079 v1(40.4,35)
NJTRST: J2.6 U1.56 | length 35.1
  Top Layer w0.2: J2.6 25.309,7.708 23.1,9.918 23.1,24.728 23.872,25.5 27.247,25.5 27.272,25.525 30.625,25.525 31.715,26.615 31.715,30.886 30.954,31.647 U1.56
RED_1: R1.1 U1.9 | length 25.9
  Top Layer w0.2: U1.9 32.584,43.213 v1(32.7,43.213)
  Bottom Layer w0.2: v1(32.7,43.213) 33.287,43.8 R1.1
RED_2: R4.1 U1.38 | length 49.6
  Top Layer w0.2: v1(19.1,30.214) 19.1,31.143 U1.38
  Bottom Layer w0.2: v1@19.1,30.394 v1(19.1,30.214) 19.1,29.7 20.6,28.2 21.834,28.2 33.934,16.1 48.4,16.1 53.2,11.3 53.2,10.3 R4.1
RED_3: R8.1 U1.26 | length 14.2
  Top Layer w0.1: U1.26 U1.26@21.089,40.911
  Top Layer w0.2: v1(19.8,42.2) U1.26@21.089,40.911
  Bottom Layer w0.2: R8.1 10.091,48.2 13.191,45.1 16.9,45.1 v1(19.8,42.2)
RED_4: R12.1 U1.33 | length 27.4
  Top Layer w0.2: v1(17,33.8) 18.222,33.8 U1.33
  Bottom Layer w0.2: R12.1 10.6,12.626 10.6,27.4 v1(17,33.8)
"RX UART5": J3.3 U1.54 | length 41.4
  Top Layer w0.2: J3.3 16.484,10.85 21.5,15.866 21.5,25.391 23.209,27.1 25.204,27.1 27.01,28.906 27.01,31.56 27.75,32.3 28.957,32.3 U1.54
SPI1_MISO: S1.9 U1.22 | length 29.6
  Top Layer w0.2: v1(21.085,43.7) 21.093,43.7 U1.22 ; v1(40.2,29.3) 40.45,29.55 S1.9
  Bottom Layer w0.2: v1(21.085,43.7) 23.1,41.685 23.1,39.6 33.4,29.3 v1(40.2,29.3)
SPI1_MOSI: S1.24 U1.23 | length 20.7
  Top Layer w0.2: U1.23 23.7,40.386 v1(23.7,40.168) ; v1(37,34.1) S1.24
  Bottom Layer w0.2: v1(23.7,40.168) 29.768,34.1 v1(37,34.1)
SPI1_SCL: S1.23 U1.21 | length 20.8
  Top Layer w0.2: U1.21 24.5,41 v1(24.6,41) ; v1(39.3,35) 39.399,35 39.95,34.449 S1.23
  Bottom Layer w0.2: v1(24.6,41) 30.6,35 v1(39.3,35)
SWCLK: J2.4 U1.49 | length 28
  Top Layer w0.2: J2.4 23.309,8.525 22.3,9.534 22.3,25.059 23.541,26.3 25.536,26.3 U1.49
SWDIO: J2.3 U1.46 | length 28.7
  Top Layer w0.2: v1(19.2,27.3) 19.85,27.95 21.493,27.95 23.494,29.95 U1.46 ; v1(20.6,12.1) 20.6,9.1 22.309,7.391 J2.3
  Bottom Layer w0.2: v1(19.2,27.3) 19.125,27.225 19.125,25.904 20.55,24.479 20.55,12.15 v1(20.6,12.1)
TRACESWO: J2.5 U1.55 | length 34.3
  Top Layer w0.2: J2.5 24.309,8.091 22.7,9.7 22.7,24.893 23.707,25.9 27.082,25.9 27.107,25.925 30.225,25.925 31.315,27.015 31.315,30.579 30.6,31.294 U1.55
"TX UART4": J4.4 U1.51 | length 28.4
  Top Layer w0.2: J4.4 5.525,26.7 22.244,26.7 23.044,27.5 24.791,27.5 v1(24.991,27.7) ; U1.51 30.6,28.536 v1(30.6,28)
  Bottom Layer w0.2: v1(24.991,27.7) 30.3,27.7 v1(30.6,28)
"TX UART5": J3.4 U1.53 | length 41.3
  Top Layer w0.2: J3.4 16.05,9.85 21.9,15.7 21.9,25.225 23.375,26.7 25.37,26.7 27.41,28.74 27.41,31.364 27.846,31.8 28.821,31.8 29.822,30.799 29.822,30.657 U1.53
"TX USART1": J4.3 U1.42 | length 18.4
  Top Layer w0.2: J4.3 8.509,27.875 9.034,28.4 16,28.4 17.15,29.55 20.61,29.55 20.932,29.872 20.932,30.147 U1.42
VCC: C1.2 C2.2 C3.2 C8.2 L1.2 R15.2 S1.8 S1.13 U1.1 U1.13 U1.19 U1.32 U1.48 U1.64 U2.4 | length 14
  Top Layer w0.1: C2.2 C2.2@38.9,28.85
  Top Layer w0.2: C2.2@38.9,28.85 39.95,29.9 S1.8 ; S1.13 43.05,31.05 43.45,31.45 C3.2 v1(45.35,31.45)
  Top Layer w0.5: C1.2 C2.2 ; C8.2 47.714,42.771 48.607,42.771 ; v1(49.2,39.8) 50.339,40.939 L1.2 48.607,42.771 ; U2.4 48.607,42.838 48.607,42.771
  other v1: 25.188,35.788
pads on no net: J1.4 J4.1 J5.5 J6.1 J6.6 J11.1 S1.1 S1.2 S1.3 S1.4 S1.5 S1.6 S1.7 S1.14 S1.15 S1.16 S1.17 S1.19 S1.20 S1.21 S1.25 U1.7 U1.12 U1.14 U1.15 U1.29 U1.36 U1.57 U1.58 U1.59 U3.6
copper on no net:
  other v2: 40.15,31.75 41.25,31.75 40.15,32.85 41.25,32.85
  other v3: 3.5,3.5 61.5,3.5 3.5,52.5 61.5,52.5

## Polygon pours and split planes (outlines as drawn)
VCC on Top Layer "3V3-Top Layer" (solid, pour order 7): 62.46,56 cw(c62.46,53.46) 65,53.46 65,2.54 cw(c62.46,2.54) 62.46,0 2.54,0 cw(c2.54,2.54) 0,2.54 0,53.46 cw(c2.54,53.46) 2.54,56
+5 on 5V "5V LAYER" (solid, pour order 8): 62.46,56 cw(c62.46,53.46) 65,53.46 65,2.54 cw(c62.46,2.54) 62.46,0 2.54,0 cw(c2.54,2.54) 0,2.54 0,53.46 cw(c2.54,53.46) 2.54,56
GND on GND "GND LAYER" (solid, pour order 9): 62.46,56 cw(c62.46,53.46) 65,53.46 65,2.54 cw(c62.46,2.54) 62.46,0 2.54,0 cw(c2.54,2.54) 0,2.54 0,53.46 cw(c2.54,53.46) 2.54,56
VCC on Bottom Layer "Top Layer-3V3" (solid, pour order 10): 62.46,56 cw(c62.46,53.46) 65,53.46 65,2.54 cw(c62.46,2.54) 62.46,0 2.54,0 cw(c2.54,2.54) 0,2.54 0,53.46 cw(c2.54,53.46) 2.54,56

## Silkscreen, mask and mechanical layers (free items; w line width, h text height)
Bottom Overlay:
  drawing of 34 lines, arcs and shapes, not listed
  text "TTÜ Robotiklubi" at 61.8,14.9 h5
Mechanical 1:
  lines w0.2: 0,2.49 ccw(c2.39,2.49) 0.7,0.8 ccw(c2.631,2.731) 2.631,0 3,0 62.369,0 ccw(c62.369,2.731) 64.3,0.8 ccw(c62.61,2.49) 65,2.49 65,3 65,34.1 65,53.5 ccw(c62.586,53.5) 64.293,55.207 64.2,55.3 ccw(c62.51,53.61) 62.51,56 62,56 2.5,56 ccw(c2.5,53.586) 0.793,55.293 0.7,55.2 ccw(c2.39,53.51) 0,53.51 0,53 0,2.49